# Altium PCB SA_1800_WIFI.PcbDoc (part 2 of 2)
Units mm, origin at the board's own origin, x right, y up, seen from the top; angles counter-clockwise.
Board outline 82.96 x 62.54 mm, 2 copper layers (Top Layer, Bottom Layer); 208 components, 153 nets, 664 pads, 246 vias.
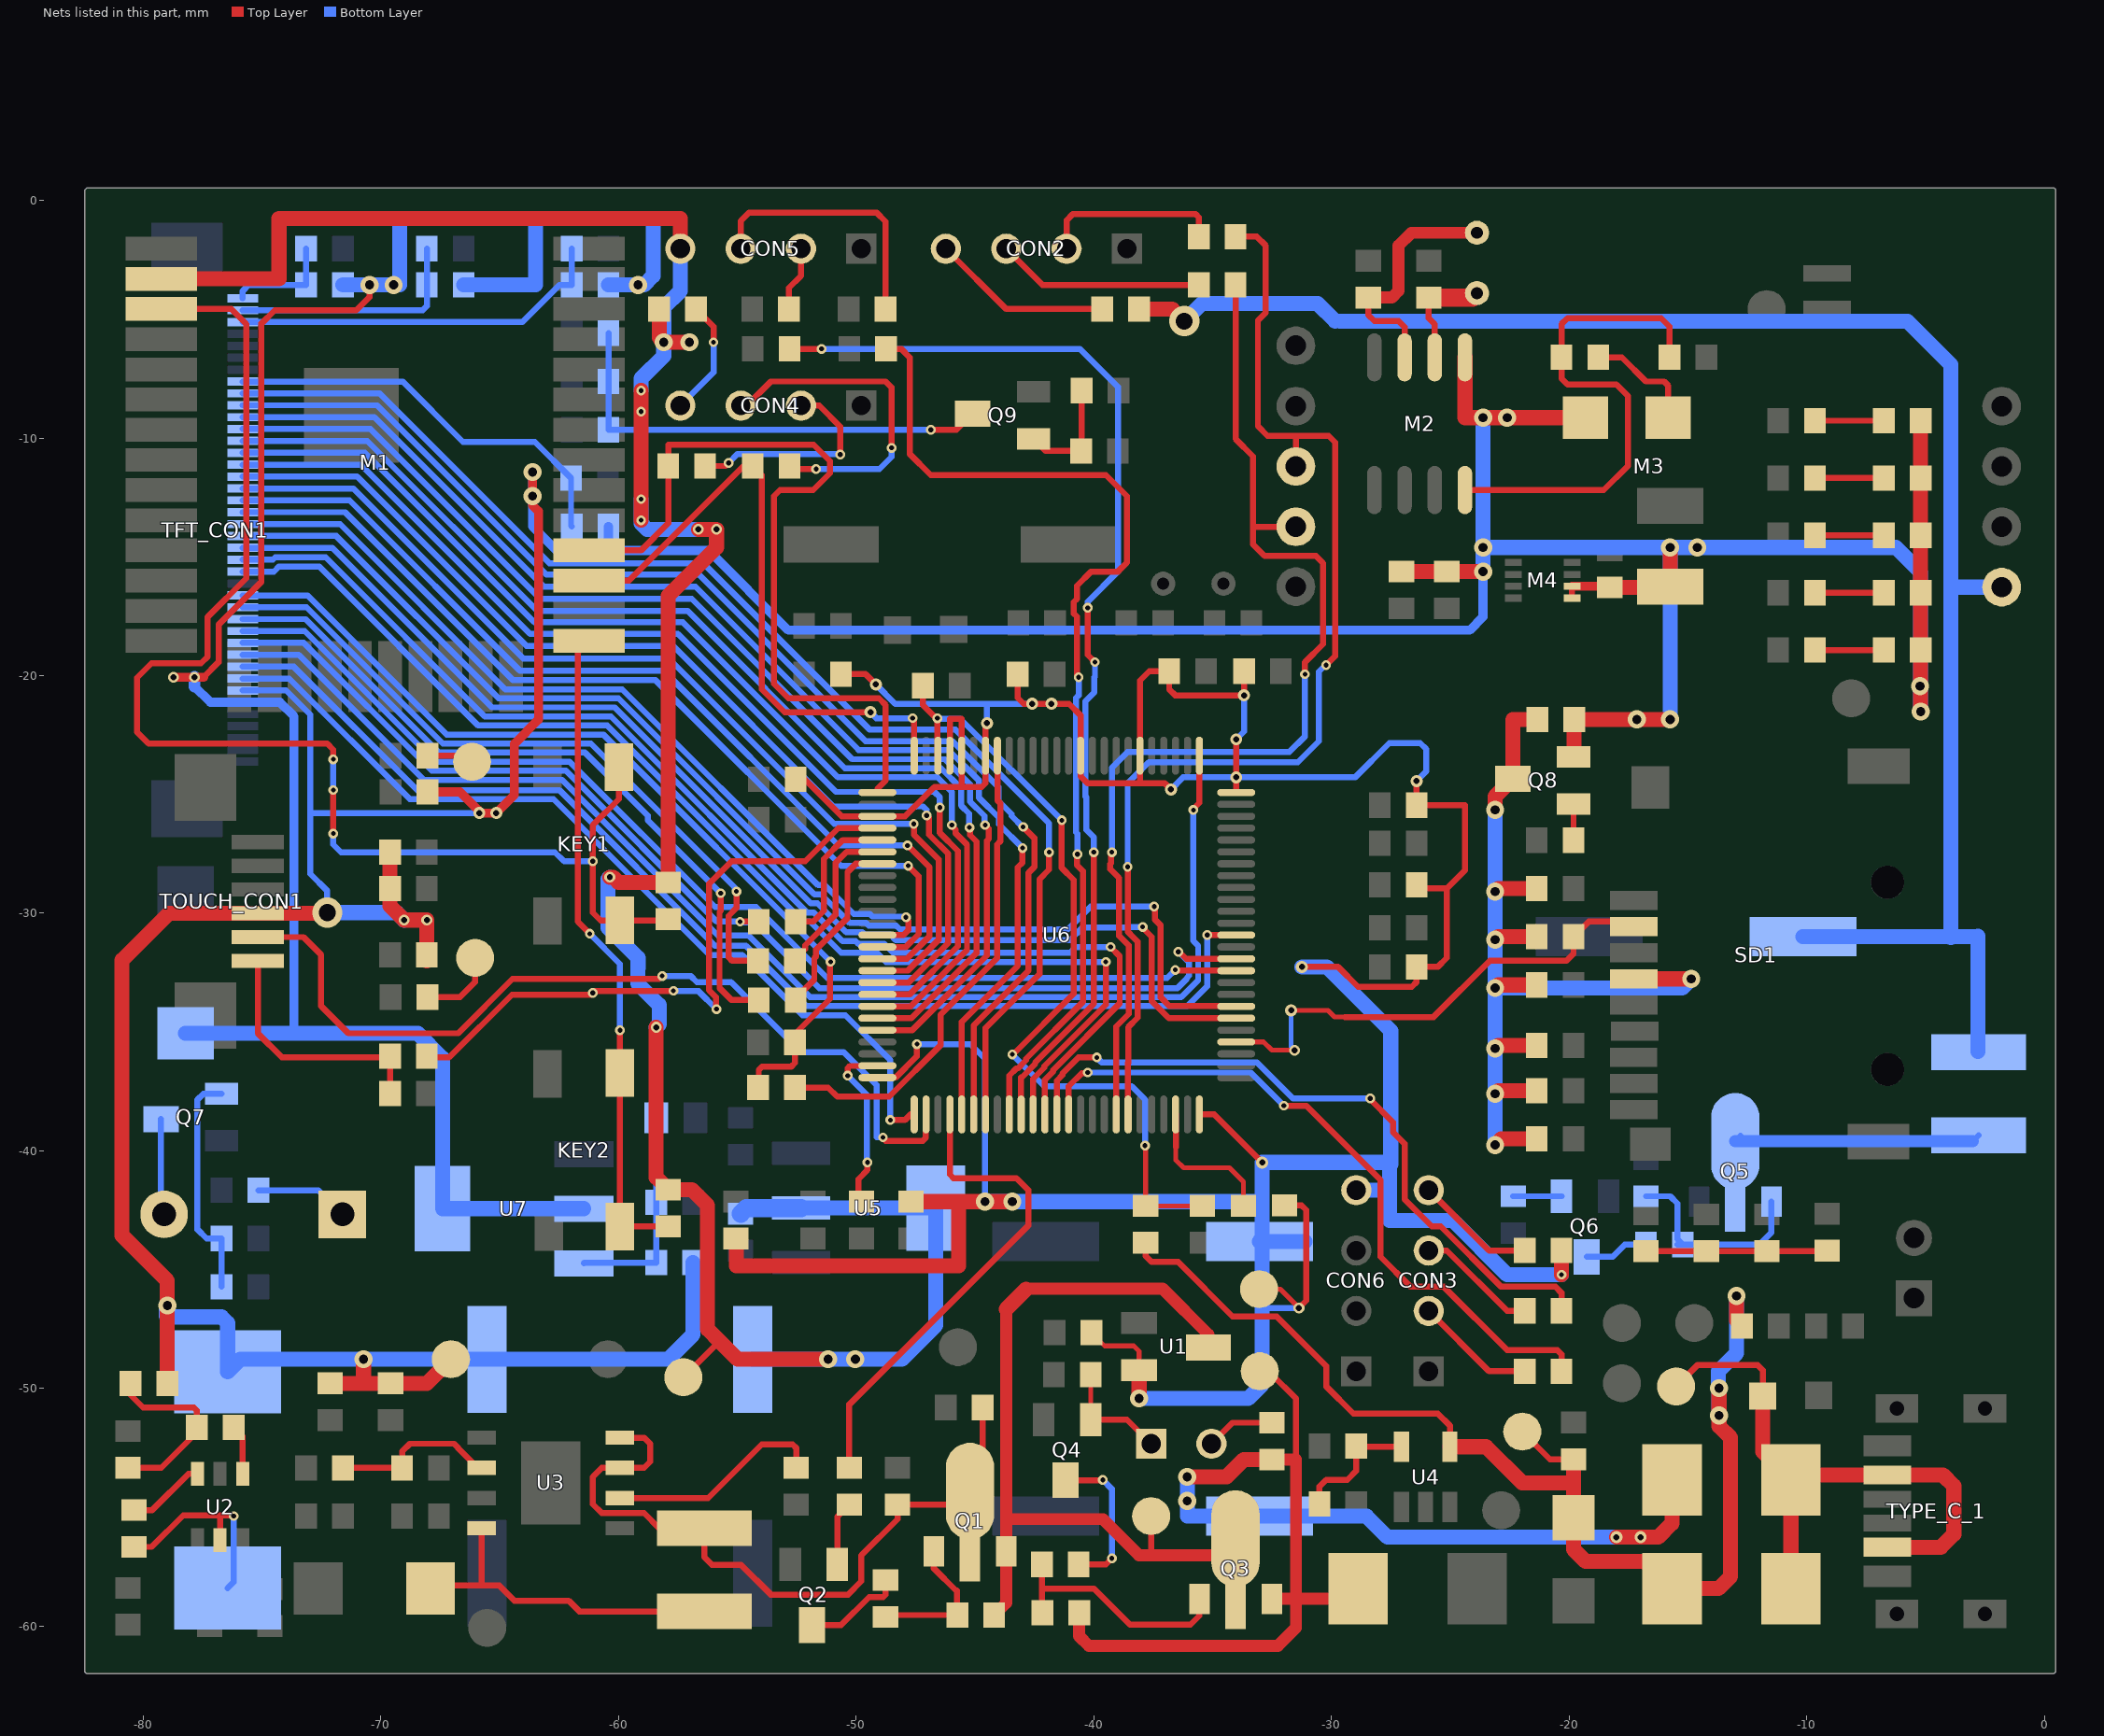
[diagram p2: the nets of this part, all layers, seen from the top]

## Via types
v1: diameter 0.762, hole 0.381, Top Layer to Bottom Layer, 94 vias
v2: diameter 0.406, hole 0.203, Top Layer to Bottom Layer, 93 vias
v3: diameter 0.508, hole 0.254, Top Layer to Bottom Layer, 32 vias
v4: diameter 0.457, hole 0.254, Top Layer to Bottom Layer, 23 vias
v5: diameter 1.27, hole 0.711, Top Layer to Bottom Layer, 2 vias
v6: diameter 0.635, hole 0.381, Top Layer to Bottom Layer, 1 vias
v7: diameter 0.406, hole 0.254, Top Layer to Bottom Layer, 1 vias

## Nets (pads, with @x,y where several pads share a name; then routed paths per layer and width w, separated by ;. In a path a pad name is that pad's centre, name@x,y a point inside that pad or via, vN(x,y) a via of type N, cw(c..) or ccw(c..) an arc to the next point about the centre after c; other vN are vias at no path point) (continued)
MCU_SDIO_D3: R108.1 SD1.2 U6.79 | length 21.1
  Top Layer w0.203: U6.79@-34.01,-35.418 -32.857,-35.418 -32.512,-35.763 v4(-31.547,-35.763) ; v3(-31.699,-34.087) -30.15,-34.087 -29.87,-34.366 -29.439,-34.366
  Top Layer w0.254: -29.439,-34.366 -25.705,-34.366 -23.343,-32.004 -20.117,-32.004 -19.812,-31.699 R108.1@-19.812,-30.988 -19.177,-30.353 -17.483,-30.353 SD1.2@-17.272,-30.564
  Bottom Layer w0.203: v3(-31.699,-34.087) -31.699,-35.687 -31.623,-35.763 v4(-31.547,-35.763)
MCU_TCH_INT_PB13: TOUCH_CON1.2 U6.52 | length 37.4
  Top Layer w0.254: TOUCH_CON1.2@-75.184,-31.004 -73.263,-31.004 -72.517,-31.75 -72.517,-33.909 -71.374,-35.052 -66.751,-35.052 -64.465,-32.766 -58.293,-32.766 v2(-58.166,-32.639) ; v2(-48.874,-39.432) -48.874,-39.467 -48.768,-39.573 -47.193,-39.573 -47.069,-39.449 -47.069,-38.477 U6.52@-47.06,-38.468
  Bottom Layer w0.254: v2(-58.166,-32.639) -56.97,-32.639 -56.71,-32.899 -55.266,-32.899 -52.326,-35.839 -50.532,-35.839 -49.149,-37.223 -49.149,-39.432 v2(-48.874,-39.432) ; v2(-48.874,-39.432) -48.874,-39.467 -48.839,-39.432 v2(-48.874,-39.432)
MCU_TCH_RST_IO_PC2: R109.1 U6.29 | length 27.1
  Top Layer w0.254: R109.1@-68.072,-36.068 -67.132,-36.068 -64.491,-33.426 -61.163,-33.426 v2(-61.087,-33.35) ; v2@-61.087,-33.274 -57.701,-33.274 v2(-57.693,-33.265) ; v2(-55.88,-34.036) -55.909,-34.007 -55.909,-33.53 -56.197,-33.241 -56.197,-28.753 -56.185,-28.753 -55.245,-27.813 -52.146,-27.813 -50.751,-26.418 U6.29@-49.11,-26.418
  Bottom Layer w0.254: v2(-57.693,-33.265) -57.678,-33.28 -56.636,-33.28 v2(-55.88,-34.036)
MCU_TFT_RST_IO_PC3: R71.2 U6.18 | length 20.5
  Top Layer w0.254: R71.2@-52.578,-37.338 -51.181,-37.338 -50.8,-37.719 -48.616,-37.719 -46.457,-35.56 -46.457,-34.276 -44.069,-31.888 -44.069,-27.102 -43.942,-26.975 -43.942,-25.365 -44.06,-25.247 U6.18@-44.06,-23.368
MCU_USART1_RX_CO2: M3.3 R28.1 U6.69 | length 49.9
  Top Layer w0.254: v2(-38.578,-28.047) -38.56,-28.065 -38.56,-30.788 -38.329,-31.019 -38.151,-31.197 -38.151,-34.391 -38.557,-34.798 -38.557,-36.296 -38.56,-36.298 U6.69@-38.56,-38.468 ; R28.1@-34.036,-1.524 -33.147,-1.524 -32.766,-1.905 -32.766,-4.724 -33.096,-5.055 -33.096,-9.5 -32.69,-9.906 -30.124,-9.906 -29.845,-10.185 -29.845,-19.177 v2(-30.226,-19.558) v2@-30.247,-19.579 ; M3.3@-31.496,-11.196 -31.496,-9.957
  Bottom Layer w0.254: v2(-38.578,-28.047) -38.578,-24.532 -37.694,-23.647 -31.42,-23.647 -30.531,-22.758 -30.531,-19.837 -30.293,-19.599 -30.226,-19.599 v2(-30.226,-19.558)
MCU_USART1_TX_CO2: M3.2 R29.1 U6.68 | length 47.7
  Top Layer w0.254: v2(-39.243,-27.432) -39.272,-27.461 -39.272,-27.897 -39.308,-27.933 -39.308,-28.143 -38.941,-28.51 -38.941,-30.946 -38.71,-31.177 -38.532,-31.355 -38.532,-34.233 -39.06,-34.761 U6.68@-39.06,-38.468 ; R29.1@-34.036,-3.556 -34.036,-10.033 -33.299,-10.77 -33.299,-14.478 -32.817,-14.961 -30.658,-14.961 -30.353,-15.265 -30.353,-18.669 -31.115,-19.431 v2(-31.115,-19.939) ; -33.253,-13.736 M3.2@-31.496,-13.736
  Bottom Layer w0.254: v2(-39.243,-27.432) -39.243,-23.876 -38.583,-23.216 -31.775,-23.216 -31.115,-22.555 v2(-31.115,-19.939)
MCU_USART2_RX_WIFI: M1.28 R34.1 U6.26 | length 34.1
  Top Layer w0.254: M1.28@-61.248,-14.732 -59.055,-14.732 -57.912,-13.589 R34.1@-57.912,-11.176 -57.912,-10.287 -51.791,-10.287 -51.105,-10.973 -51.105,-11.481 -51.816,-12.192 -53.213,-12.192 -53.467,-12.446 -53.467,-20.345 -52.857,-20.955 -49.047,-20.955 -48.761,-21.241 -48.761,-24.413 -49.11,-24.762
MCU_USART2_TX_WIFI: M1.27 R35.1 U6.25 | length 26.9
  Top Layer w0.254: M1.27@-61.248,-16.002 -59.563,-16.002 -54.737,-11.176 R35.1@-54.356,-11.176 -53.975,-11.557 -53.975,-20.574 -53.01,-21.539 v3(-49.403,-21.539) ; v2(-47.625,-21.789) -47.625,-21.83 -47.56,-21.895 -47.56,-23.347 U6.25@-47.569,-23.356
  Bottom Layer w0.254: v3(-49.403,-21.539) -49.153,-21.789 v2(-47.625,-21.789)
MCU_USART6_RX: R31.1 U6.64 | length 29.7
  Top Layer w0.254: U6.64@-41.06,-38.468 -41.06,-37.287 -40.505,-36.732 -40.288,-36.732 v2(-40.259,-36.703) ; v2(-32.004,-38.1) -31.064,-38.1 -27.94,-41.224 -27.94,-44.45 -26.67,-45.72 -25.273,-45.72 -22.606,-48.387 -20.498,-48.387 -20.32,-48.565 R31.1@-20.32,-49.276
  Bottom Layer w0.254: v2(-40.259,-36.703) -33.401,-36.703 v2(-32.004,-38.1)
MCU_USART6_TX: R32.1 U6.63 | length 29.7
  Top Layer w0.254: U6.63@-41.56,-38.468 -41.56,-37.048 -41.326,-36.814 -41.326,-36.75 -40.644,-36.068 v2(-39.878,-36.068) ; v2(-28.372,-37.795) -28.413,-37.795 -27.407,-38.802 -27.407,-39.218 -26.924,-39.7 -26.924,-42.037 -25.781,-43.18 -25.4,-43.18 -22.86,-45.72 -20.574,-45.72 -20.32,-45.974 R32.1@-20.32,-46.736
  Bottom Layer w0.254: v2(-39.878,-36.068) -39.675,-36.271 -33.147,-36.271 -31.623,-37.795 v2(-28.372,-37.795)
MCU_VCC_ALL_CTR_PB15: R2.1 U6.54 | length 20.9
  Top Layer w0.254: R2.1@-50.292,-53.34 -50.292,-50.673 -42.763,-43.144 -42.763,-41.641 -43.256,-41.148 -45.911,-41.148 -46.06,-40.999 U6.54@-46.06,-38.468
MCU_WAKE_UP_PA0: C17.2 R19.1 R20.2 U6.23 | length 34.7
  Top Layer w0.203: v2(-37.846,-39.776) -37.821,-39.802 R19.1@-37.821,-42.316 R20.2@-35.433,-42.316
  Top Layer w0.254: C17.2@-47.193,-20.422 -47.193,-21.234 v2@-46.584,-21.844 ; v2(-46.584,-21.793) v2@-46.584,-21.844 ; U6.23@-46.56,-23.368 -46.584,-23.344 v2@-46.584,-21.844 ; v2@-46.56,-21.868 v2@-46.584,-21.844 ; v2@-43.399,-35.941 -40.843,-33.385 -40.843,-28.6 -41.351,-28.092 v2(-41.351,-26.086) v2@-41.275,-26.086
  Bottom Layer w0.254: v2@-46.56,-21.819 -45.618,-21.819 v2(-41.351,-26.086) ; v2(-43.434,-35.941) -42.088,-37.287 -38.405,-37.287 -37.846,-37.846 v2(-37.846,-39.776)
NetC3_2: C3.2 C4.2 L2.1 Q1.2 U3.3 U3.4 | length 30.7
  Top Layer w0.254: U3.4@-59.944,-52.07 -58.928,-52.07 -58.674,-52.324 -58.674,-53.086 -58.928,-53.34 U3.3@-59.944,-53.34 -60.706,-53.34 -61.087,-53.721 -61.087,-54.864 -60.706,-55.245 -58.928,-55.245 -58.293,-55.88 L2.1@-56.388,-55.88 -56.388,-57.099 -56.068,-57.419 -54.849,-57.419 -53.594,-58.674 -50.345,-58.674 -49.784,-58.113 -49.784,-57.023 -48.26,-55.499 C3.2@-48.26,-54.889 -45.787,-54.889 Q1.2@-45.212,-54.314 -44.679,-53.781 C4.2@-44.679,-50.8
NetC6_1: C6.1 L1.1 U2.2 | length 8.9
  Top Layer w0.254: C6.1@-80.391,-56.667 -79.654,-56.667 -78.324,-55.337 -76.774,-55.337 ; U2.2@-76.774,-56.388 -76.774,-55.337 ; v2(-76.2,-55.372) -76.235,-55.337 -76.774,-55.337
  Bottom Layer w0.254: L1.1@-76.454,-58.398 -76.2,-58.144 v2(-76.2,-55.372)
NetC6_2: C6.2 U2.6 | length 3.3
  Top Layer w0.254: C6.2@-80.391,-55.118 -79.629,-55.118 -78.099,-53.588 U2.6@-77.724,-53.588
NetC18_2: C18.2 R22.1 R23.2 R24.2 | length 7.6
  Top Layer w0.254: R24.2@-16.764,-44.221 R23.2@-14.224,-44.221 C18.2@-11.684,-44.221 R22.1@-9.169,-44.221
NetC28_2: C28.2 U6.49 | length 7.5
  Top Layer w0.254: v2(-50.362,-36.836) -50.354,-36.836 -50.354,-36.511 -50.27,-36.427 -49.119,-36.427 U6.49@-49.11,-36.418 ; C28.2@-50.06,-42.139 -49.911,-41.99 -49.911,-41.189 -49.53,-40.808 v2(-49.53,-40.488)
  Bottom Layer w0.254: v2(-50.362,-36.836) -49.555,-37.642 -49.555,-40.462 v2(-49.53,-40.488)
NetC30_2: C30.2 M2.2 X1.1 | length 4.7
  Top Layer w0.254: C30.2@-25.908,-4.089 -25.908,-4.953 -25.654,-5.207 M2.2@-25.654,-6.604
  Top Layer w0.762: C30.2@-25.908,-4.089 -24.065,-4.089 X1.1@-23.876,-3.9
NetC31_2: C31.2 M2.3 X1.2 | length 10.6
  Top Layer w0.254: C31.2@-28.448,-4.089 -28.448,-4.826 -28.194,-5.08 -27.178,-5.08 -26.924,-5.334 M2.3@-26.924,-6.604
  Top Layer w0.508: C31.2@-28.448,-4.089 -27.457,-4.089 -27.178,-3.81 -27.178,-1.905 -26.633,-1.36 X1.2@-23.876,-1.36
NetC33_1: C33.1 U6.73 | length 6.2
  Top Layer w0.203: -36.551,-39.835 -36.551,-40.386 -36.22,-40.716 -34.29,-40.716 -33.706,-41.3 C33.1@-33.706,-42.316
  Top Layer w0.254: U6.73@-36.56,-38.468 -36.551,-38.477 -36.551,-39.835
NetC40_1: C40.1 R57.1 R58.1 U7.3 | length 9.2
  Bottom Layer w0.254: U7.3@-61.468,-44.732 -61.44,-44.704 R58.1@-58.42,-44.704 R57.1@-58.42,-42.164 C40.1@-58.42,-38.608
NetCON1_1: CON1.1 Q4.1 R10.1 | length 4.8
  Top Layer w0.203: Q4.1@-40.132,-51.308 R10.1@-40.132,-49.422
  Top Layer w0.254: Q4.1@-40.132,-51.308 -38.608,-51.308 CON1.1@-37.592,-52.324
NetCON1_2: CON1.2 R8.2 | length 2.9
  Top Layer w0.254: CON1.2@-35.052,-52.324 -34.169,-51.441 R8.2@-32.512,-51.441
NetCON2_2: CON2.2 R28.2 | length 7.7
  Top Layer w0.254: CON2.2@-41.148,-2.032 -41.148,-0.838 -40.894,-0.584 -35.712,-0.584 -35.585,-0.711 R28.2@-35.585,-1.524
NetCON2_3: CON2.3 R29.2 | length 8.7
  Top Layer w0.254: CON2.3@-43.688,-2.032 -42.164,-3.556 R29.2@-35.585,-3.556
NetCON2_4: CON2.4 R30.2 | length 7.6
  Top Layer w0.254: CON2.4@-46.228,-2.032 -43.688,-4.572 R30.2@-39.649,-4.572
NetCON3_2: CON3.2 R31.2 | length 5.1
  Top Layer w0.254: CON3.2@-25.908,-46.736 -23.368,-49.276 R31.2@-21.869,-49.276
NetCON3_3: CON3.3 R32.2 | length 5.1
  Top Layer w0.254: CON3.3@-25.908,-44.196 -25.146,-44.196 -22.606,-46.736 R32.2@-21.869,-46.736
NetCON3_4: CON3.4 R33.2 | length 5.1
  Top Layer w0.254: CON3.4@-25.908,-41.656 -23.368,-44.196 R33.2@-21.869,-44.196
NetCON4_2: CON4.2 R34.2 | length 9.1
  Top Layer w0.254: R34.2@-56.363,-11.176 -55.499,-11.176 v2(-55.372,-11.049) ; CON4.2@-52.324,-8.636 -51.562,-8.636 -50.673,-9.525 v2(-50.673,-10.693)
  Bottom Layer w0.254: v2(-55.372,-11.049) -54.991,-10.668 v2@-50.673,-10.668
NetCON4_3: CON4.3 R35.2 | length 14.4
  Top Layer w0.254: CON4.3@-54.864,-8.636 -54.61,-8.636 -53.594,-7.62 -48.768,-7.62 -48.514,-7.874 v2(-48.514,-10.414) ; R35.2@-52.807,-11.176 -52.68,-11.303 v2(-51.689,-11.303)
  Bottom Layer w0.254: v2(-51.689,-11.303) -49.022,-11.303 -48.514,-10.795 v2(-48.514,-10.414)
NetCON4_4: CON4.4 R36.2 | length 4.9
  Top Layer w0.254: R36.2@-56.744,-4.572 -56.007,-5.309 v2(-56.007,-5.969)
  Bottom Layer w0.254: CON4.4@-57.404,-8.636 -56.007,-7.239 v2(-56.007,-5.969)
NetCON5_2: CON5.2 R37.1 | length 2.8
  Top Layer w0.254: R37.1@-52.832,-4.572 -52.832,-3.683 -52.324,-3.175 CON5.2@-52.324,-2.032
NetCON5_3: CON5.3 R38.1 | length 11.3
  Top Layer w0.254: CON5.3@-54.864,-2.032 -54.864,-0.864 -54.508,-0.508 -49.149,-0.508 -48.768,-0.889 R38.1@-48.768,-4.572
NetD4_2: D4.2 L2.2 U3.8 | length 14.5
  Top Layer w0.254: D4.2@-67.922,-58.42 -67.795,-58.293 -65.786,-58.293 ; U3.8@-65.761,-55.88 -65.761,-58.268 -65.786,-58.293 ; L2.2@-56.388,-59.38 -61.651,-59.38 -62.103,-58.928 -64.389,-58.928 -65.024,-58.293 -65.786,-58.293
NetD6_2: D6.2 R48.2 | length 4.8
  Top Layer w0.254: R48.2@-18.771,-6.604 -17.78,-6.604 -16.764,-7.62 -16.002,-7.62 -15.824,-7.798 D6.2@-15.824,-9.144
NetKEY1_2: KEY1.2 M1.3 R21.1 | length 57.8
  Top Layer w0.254: M1.3@-79.248,-4.572 -76.302,-4.572 -75.667,-5.207 -75.667,-15.9 -77.292,-17.526 -77.292,-19.202 -77.572,-19.482 -79.654,-19.482 -80.264,-20.091 -80.264,-22.377 -79.781,-22.86 -72.263,-22.86 -72.009,-23.114 v2(-72.009,-23.52) ; v2(-72.009,-26.645) v2(-72.009,-24.816) ; KEY1.2@-59.992,-23.852 -59.992,-25.194 -61.087,-26.289 v2(-61.087,-27.813) -61.087,-29.972 -60.757,-30.302 KEY1.2@-59.943,-30.302 -57.962,-30.302 R21.1@-57.912,-30.251
  Bottom Layer w0.254: v2(-72.009,-26.645) -72.009,-27.102 -71.679,-27.432 -62.676,-27.432 -62.295,-27.813 v2(-61.087,-27.813) ; v2(-72.009,-24.816) v2(-72.009,-23.52)
NetKEY2_1: KEY2.1 M1.25 R25.1 | length 27.6
  Top Layer w0.254: M1.25@-61.248,-18.542 -61.722,-19.016 -61.722,-30.353 v2(-61.214,-30.861) ; v2(-59.944,-34.925) -59.944,-35.293 -59.957,-35.306 -59.957,-36.716 KEY2.1@-59.944,-36.728 KEY2.1@-59.944,-43.18 R25.1@-57.912,-43.18
  Bottom Layer w0.254: v2(-61.214,-30.861) -59.944,-32.131 v2(-59.944,-34.925)
NetL3_1: L3.1 Q5.2 | length 10.7
  Bottom Layer w0.254: Q5.2@-13.007,-39.592 Q5.2@-12.785,-39.37 ; L3.1@-3.016,-39.592 L3.1@-2.769,-39.345
  Bottom Layer w0.508: Q5.2@-13.007,-39.592 L3.1@-3.016,-39.592
NetLED_SMD1_1: LED_SMD1.1 R50.2 | length 2.9
  Top Layer w0.254: LED_SMD1.1@-9.652,-18.923 R50.2@-6.756,-18.923
NetLED_SMD2_1: LED_SMD2.1 R51.2 | length 2.9
  Top Layer w0.254: LED_SMD2.1@-9.652,-16.51 R51.2@-6.756,-16.51
NetLED_SMD3_1: LED_SMD3.1 R52.2 | length 2.9
  Top Layer w0.254: LED_SMD3.1@-9.652,-14.097 R52.2@-6.756,-14.097
NetLED_SMD4_1: LED_SMD4.1 R53.2 | length 2.9
  Top Layer w0.254: LED_SMD4.1@-9.652,-11.684 R53.2@-6.756,-11.684
NetLED_SMD5_1: LED_SMD5.1 R54.2 | length 2.9
  Top Layer w0.254: LED_SMD5.1@-9.652,-9.271 R54.2@-6.756,-9.271
NetM2_8: M2.8 R48.1 R55.2 | length 21.7
  Top Layer w0.254: M2.8@-24.384,-12.192 -18.542,-12.192 -17.526,-11.176 -17.526,-8.23 -18.009,-7.747 -20.066,-7.747 -20.32,-7.493 R48.1@-20.32,-6.604 -20.32,-5.207 -20.066,-4.953 -16.129,-4.953 -15.773,-5.309 R55.2@-15.773,-6.604
NetQ1_1: Q1.1 R1.2 R4.1 | length 6.2
  Top Layer w0.254: R4.1@-48.768,-59.614 -48.69,-59.536 R1.2@-45.745,-59.536 -45.762,-59.519 -45.762,-58.505 -45.802,-58.505 -46.736,-57.571 Q1.1@-46.736,-56.854
NetQ2_1: Q2.1 R2.2 | length 2.7
  Top Layer w0.254: Q2.1@-50.8,-57.404 -50.8,-55.397 R2.2@-50.292,-54.889
NetQ2_3: Q2.3 R4.2 | length 4.2
  Top Layer w0.254: Q2.3@-51.867,-59.957 -50.64,-59.957 -49.459,-58.776 -48.87,-58.776 -48.768,-58.674 R4.2@-48.768,-58.064
NetQ3_1: Q3.1 R9.1 R12.2 | length 10.2
  Top Layer w0.254: R12.2@-42.189,-57.404 -42.189,-58.42 ; R9.1@-42.164,-59.436 -42.189,-59.411 -42.189,-58.42 ; Q3.1@-35.56,-58.854 -35.56,-59.563 -35.941,-59.944 -38.481,-59.944 -40.005,-58.42 -42.189,-58.42
NetQ4_3: Q4.3 R12.1 | length 6.5
  Top Layer w0.254: Q4.3@-41.199,-53.861 -39.637,-53.861 v2(-39.624,-53.848) ; R12.1@-40.64,-57.404 -39.497,-57.404 v2(-39.243,-57.15)
  Bottom Layer w0.254: v2(-39.624,-53.848) -39.243,-54.229 v2(-39.243,-57.15)
NetQ5_1: Q5.1 R73.1 R77.2 | length 8.7
  Bottom Layer w0.254: R73.1@-16.764,-41.91 -15.748,-41.91 -15.443,-42.215 -15.443,-43.713 R77.2@-15.215,-43.942 ; R77.2@-15.443,-43.942 R77.2@-15.215,-43.942 ; Q5.1@-11.483,-42.132 -11.483,-43.434 -11.991,-43.942 R77.2@-15.215,-43.942
NetQ6_1: Q6.1 R69.1 | length 2
  Bottom Layer w0.254: R69.1@-22.352,-41.91 Q6.1@-20.32,-41.91
NetQ6_3: Q6.3 R77.1 | length 2.7
  Bottom Layer w0.254: Q6.3@-19.253,-44.463 -18.174,-44.463 -17.653,-43.942 R77.1@-16.764,-43.942
NetQ7_1: Q7.1 R75.1 R81.2 | length 9.8
  Bottom Layer w0.254: R75.1@-76.708,-45.72 R81.2@-76.708,-43.688 -77.343,-43.688 -77.724,-43.307 -77.724,-37.846 -77.47,-37.592 Q7.1@-76.708,-37.592
NetQ7_3: Q7.3 SPK1.2 | length 4.1
  Bottom Layer w0.254: Q7.3@-79.261,-38.659 -79.261,-42.539 SPK1.2@-79.128,-42.672
NetQ8_1: Q8.1 R76.1 | length 1.5
  Top Layer w0.254: R76.1@-19.812,-26.924 Q8.1@-19.812,-25.4
NetQ9_1: Q9.1 R115.1 R116.2 | length 4.8
  Top Layer w0.254: Q9.1@-42.545,-10.033 -42.037,-10.541 R116.2@-40.538,-10.541 -40.513,-10.516 R115.1@-40.513,-8.001
NetQ9_3: Q9.3 R112.2 R113.2 R114.2 | length 19.7
  Top Layer w0.254: v2(-46.863,-9.652) -45.783,-9.652 Q9.3@-45.098,-8.966
  Bottom Layer w0.254: R114.2@-60.427,-5.588 R113.2@-60.427,-7.62 R112.2@-60.427,-9.652 v2(-46.863,-9.652)
NetR3_1: R3.1 R7.2 U4.5 | length 5.5
  Top Layer w0.254: R7.2@-30.505,-54.864 -30.505,-54.127 -30.226,-53.848 -29.337,-53.848 -28.956,-53.467 R3.1@-28.956,-52.424 -28.929,-52.451 U4.5@-27.051,-52.451
NetR6_1: R6.1 U3.2 | length 9.3
  Top Layer w0.254: U3.2@-59.944,-54.61 -56.236,-54.61 -53.975,-52.349 -52.68,-52.349 -52.527,-52.502 R6.1@-52.527,-53.34
NetR11_1: R11.1 U2.4 | length 2.1
  Top Layer w0.254: R11.1@-76.2,-51.638 -75.819,-52.019 -75.819,-53.583 U2.4@-75.824,-53.588
NetR11_2: R11.2 R13.2 R14.1 | length 8
  Top Layer w0.254: R14.1@-80.645,-53.34 -79.248,-53.34 -77.749,-51.841 R11.2@-77.749,-51.638 -77.749,-50.927 -77.876,-50.8 -80.01,-50.8 -80.539,-50.271 R13.2@-80.539,-49.784
NetR15_2: R15.2 R16.2 U3.6 | length 7.1
  Top Layer w0.254: R15.2@-71.603,-53.34 R16.2@-69.113,-53.34 -69.113,-52.654 -68.783,-52.324 -66.929,-52.324 -66.742,-52.511 -66.742,-52.528 -65.929,-53.34 U3.6@-65.761,-53.34
NetR26_2: R26.2 TEST16.1 | length 2
  Top Layer w0.254: R26.2@-68.047,-23.368 -66.421,-23.368 TEST16.1@-66.167,-23.622
NetR27_2: R27.2 TEST17.1 | length 3.3
  Top Layer w0.254: R27.2@-68.047,-33.528 -66.675,-33.528 -66.04,-32.893 TEST17.1@-66.04,-31.877
NetR39_2: R39.2 U6.30 | length 6.1
  Top Layer w0.254: R39.2@-52.553,-30.353 -51.816,-30.353 -51.359,-29.896 -51.359,-27.711 -50.565,-26.918 U6.30@-49.11,-26.918
NetR40_2: R40.2 U6.31 | length 6.8
  Top Layer w0.254: R40.2@-52.578,-32.004 -52.578,-31.928 -52.146,-31.496 -52.146,-31.344 -50.876,-30.074 -50.876,-27.889 -50.405,-27.418 U6.31@-49.11,-27.418
NetR41_2: R41.2 U6.32 | length 7.7
  Top Layer w0.254: R41.2@-52.553,-33.655 -52.553,-33.579 -51.765,-32.791 -51.765,-31.888 -51.689,-31.813 -51.689,-31.521 -50.368,-30.201 -50.368,-28.27 -50.016,-27.918 U6.32@-49.11,-27.918
NetR42_2: R42.2 U6.60 | length 47.4
  Top Layer w0.254: R42.2@-52.807,-6.248 v2(-51.46,-6.248) ; U6.60@-43.06,-38.468 -43.06,-36.906 -43.034,-36.906 -42.469,-36.341 -42.469,-36.277 -40.005,-33.813 v2(-40.005,-27.432) ; v2@-40.259,-17.069 v2(-40.259,-17.145) -40.259,-19.126 v2(-39.954,-19.431)
  Bottom Layer w0.254: v2(-51.46,-6.248) -40.589,-6.248 -38.989,-7.849 -38.989,-15.621 -40.259,-16.891 v2(-40.259,-17.145) ; v2(-40.005,-27.432) -40.005,-26.798 -40.31,-26.493 -40.31,-25.127 -40.366,-25.071 -40.366,-21.093 -39.98,-20.706 -39.98,-20.066 -39.954,-20.041 v2(-39.954,-19.431)
NetR43_2: R43.2 U6.59 | length 44.3
  Top Layer w0.254: R43.2@-48.743,-6.248 -48.108,-6.248 -47.752,-6.604 -47.752,-10.668 -46.863,-11.557 -39.497,-11.557 -38.608,-12.446 -38.608,-15.24 -38.989,-15.621 -40.115,-15.621 -40.716,-16.222 -40.716,-16.776 -40.843,-16.903 -40.843,-17.387 -40.716,-17.514 -40.716,-19.99 v2(-40.64,-20.066) ; U6.59@-43.56,-38.468 -43.56,-36.829 -43.256,-36.525 -43.192,-36.525 -42.85,-36.183 -42.85,-36.119 -40.462,-33.731 -40.462,-28.227 -40.718,-27.972 -40.718,-27.543 v2(-40.691,-27.516)
  Bottom Layer w0.254: v2(-40.691,-27.516) -40.691,-26.651 -40.747,-26.595 -40.747,-20.935 -40.64,-20.828 v2(-40.64,-20.066)
NetR59_1: R59.1 R61.1 TFT_CON1.38 | length 16
  Bottom Layer w0.254: TFT_CON1.38@-75.819,-5.122 -64.05,-5.122 -62.484,-3.556 R59.1@-61.976,-3.556 R61.1@-61.976,-2.032
NetR62_1: R62.1 R64.1 TFT_CON1.39 | length 10.2
  Bottom Layer w0.254: TFT_CON1.39@-75.819,-4.622 -68.249,-4.622 -68.072,-4.445 R62.1@-68.072,-3.556 R64.1@-68.072,-2.032
NetR65_1: R65.1 R67.1 TFT_CON1.40 | length 4.6
  Bottom Layer w0.254: TFT_CON1.40@-75.819,-4.122 -75.819,-3.81 -75.565,-3.556 R65.1@-73.152,-3.556 R67.1@-73.152,-2.032
NetR70_1: R70.1 R71.1 TFT_CON1.15 | length 38.4
  Top Layer w0.254: R71.1@-54.127,-37.338 -54.102,-37.313 -54.102,-36.598 -53.953,-36.449 -52.727,-36.449 -52.578,-36.3 R70.1@-52.578,-35.433 -52.578,-35.077 -51.11,-33.61 -51.11,-32.069 v2(-51.081,-32.04)
  Bottom Layer w0.254: TFT_CON1.15@-75.819,-16.622 -73.099,-16.622 -67.242,-22.479 -60.642,-22.479 v2(-51.081,-32.04)
NetR83_1: R83.1 SPK1.1 | length 4
  Bottom Layer w0.254: R83.1@-75.159,-41.656 -72.644,-41.656 SPK1.1@-71.628,-42.672
NetR107_1: R107.1 R117.2 TFT_CON1.33 | length 17.5
  Bottom Layer w0.254: TFT_CON1.33@-75.819,-7.622 -69.086,-7.622 -66.548,-10.16 -63.525,-10.16 R117.2@-62.001,-11.684 -62.001,-13.691 R107.1@-61.976,-13.716
NetR109_2: R109.2 R110.2 TOUCH_CON1.1 | length 10.6
  Top Layer w0.254: TOUCH_CON1.1@-75.184,-32.004 -75.184,-35.052 -74.168,-36.068 -69.621,-36.068 R110.2@-69.621,-37.592
POW_ALL: C14.1 D1.2 D5.2 Q3.3 R8.1 R9.2 TEST6.1 | length 56.5
  Top Layer w0.254: TEST6.1@-33.02,-49.276 -32.639,-49.276 TEST6.1@-32.512,-49.403 ; TEST6.1@-32.512,-49.276 TEST6.1@-32.512,-49.403 ; -31.496,-52.99 -31.496,-50.419 TEST6.1@-32.512,-49.403 ; D5.2@-29.31,-58.854 D5.2@-28.876,-58.42
  Top Layer w0.508: R9.2@-40.615,-59.436 -40.615,-60.427 -40.208,-60.833 -32.258,-60.833 -31.496,-60.071 -31.496,-58.854 ; Q3.3@-32.512,-58.854 -31.496,-58.854 ; R8.1@-32.512,-52.99 -31.496,-52.99 -31.496,-58.854 ; D5.2@-29.31,-58.854 -31.496,-58.854
  Top Layer w0.635: v1(-36.068,-53.721) -34.417,-53.721 -33.686,-52.99 R8.1@-32.512,-52.99 ; v3(-18.009,-56.261) v3(-16.993,-56.261) -16.256,-56.261 -15.668,-55.673 D1.2@-15.668,-53.848
  Bottom Layer w0.635: v1(-36.068,-53.721) v1(-36.068,-54.737) -36.068,-55.372 C14.1@-33.02,-55.372 -28.524,-55.372 -27.635,-56.261 v3(-18.009,-56.261) v3@-17.018,-56.261
TFT_P_DB0_FSMC_D0: TFT_CON1.17 U6.61 | length 51
  Top Layer w0.254: U6.61@-42.56,-38.468 -42.56,-36.971 -42.088,-36.499 -42.088,-36.434 -39.497,-33.844 v2(-39.497,-32.048)
  Bottom Layer w0.254: TFT_CON1.17@-75.819,-15.622 -74.513,-15.622 -74.294,-15.403 -72.608,-15.403 -65.913,-22.098 -60.484,-22.098 -52.236,-30.346 -51.949,-30.346 -50.632,-31.663 -49.135,-31.663 -48.75,-32.048 v2(-39.497,-32.048)
TFT_P_DB1_FSMC_D1: TFT_CON1.18 U6.62 | length 52.1
  Top Layer w0.254: U6.62@-42.06,-38.468 -42.06,-37.01 -41.707,-36.656 -41.707,-36.592 -38.913,-33.798 -38.913,-31.806 -39.294,-31.425 v2(-39.294,-31.419)
  Bottom Layer w0.254: TFT_CON1.18@-75.819,-15.122 -74.551,-15.122 -74.451,-15.022 -72.329,-15.022 -65.634,-21.717 -60.326,-21.717 -52.079,-29.965 -51.791,-29.965 -50.582,-31.174 -50.023,-31.174 -49.915,-31.282 -48.83,-31.282 -48.445,-31.667 -41.003,-31.667 -40.756,-31.419 v2(-39.294,-31.419)
TFT_P_DB2_FSMC_D2: TFT_CON1.19 U6.81 | length 52.1
  Top Layer w0.254: v2(-37.945,-30.577) -37.945,-30.618 -37.567,-30.996 -37.567,-33.698 -36.846,-34.418 U6.81@-34.01,-34.418
  Bottom Layer w0.254: TFT_CON1.19@-75.819,-14.622 -72.043,-14.622 -65.329,-21.336 -60.168,-21.336 -51.921,-29.584 -51.633,-29.584 -50.424,-30.793 -49.741,-30.793 -49.633,-30.901 -48.576,-30.901 -48.343,-31.133 -41.008,-31.133 -40.482,-30.607 -38.657,-30.607 -38.626,-30.577 v2(-37.945,-30.577)
TFT_P_DB3_FSMC_D3: TFT_CON1.20 U6.82 | length 52.9
  Top Layer w0.254: v2(-37.465,-29.718) -37.436,-29.747 -37.436,-30.26 -37.186,-30.51 -37.186,-33.54 -36.817,-33.909 -34.019,-33.909 U6.82@-34.01,-33.918
  Bottom Layer w0.254: TFT_CON1.20@-75.819,-14.122 -71.882,-14.122 -65.049,-20.955 -60.011,-20.955 -51.763,-29.203 -51.476,-29.203 -50.266,-30.412 -49.584,-30.412 -49.476,-30.52 -48.322,-30.52 -48.158,-30.683 -41.097,-30.683 -40.132,-29.718 v2(-37.465,-29.718)
TFT_P_DB4_FSMC_D4: TFT_CON1.21 U6.38 | length 36.7
  Top Layer w0.254: U6.38@-49.11,-30.918 -48.012,-30.918 -47.799,-30.705 -47.799,-30.317 -47.907,-30.209 v2(-47.907,-30.168)
  Bottom Layer w0.254: TFT_CON1.21@-75.819,-13.622 -71.722,-13.622 -64.77,-20.574 -59.853,-20.574 -51.605,-28.822 -51.318,-28.822 -50.109,-30.031 -49.426,-30.031 -49.318,-30.139 -47.936,-30.139 v2(-47.907,-30.168)
TFT_P_DB5_FSMC_D5: TFT_CON1.22 U6.39 | length 39.2
  Top Layer w0.254: U6.39@-49.11,-31.418 -47.909,-31.418 -47.371,-30.88 -47.371,-28.448 v2(-47.816,-28.004)
  Bottom Layer w0.254: TFT_CON1.22@-75.819,-13.122 -71.511,-13.122 -64.44,-20.193 -58.445,-20.193 -50.635,-28.004 v2(-47.816,-28.004)
TFT_P_DB6_FSMC_D6: TFT_CON1.23 U6.40 | length 40.8
  Top Layer w0.254: U6.40@-49.11,-31.918 -47.87,-31.918 -46.914,-30.961 -46.914,-28.065 -47.833,-27.146 v2(-47.847,-27.146)
  Bottom Layer w0.254: TFT_CON1.23@-75.819,-12.622 -71.325,-12.622 -64.16,-19.787 -58.115,-19.787 -50.756,-27.146 v2(-47.847,-27.146)
TFT_P_DB7_FSMC_D7: TFT_CON1.24 U6.41 | length 42.5
  Top Layer w0.254: U6.41@-49.11,-32.418 -47.832,-32.418 -46.533,-31.119 -46.533,-27.737 -47.575,-26.694 v2(-47.575,-26.239)
  Bottom Layer w0.254: TFT_CON1.24@-75.819,-12.122 -71.165,-12.122 -64.008,-19.279 -57.887,-19.279 -50.926,-26.239 v2(-47.575,-26.239)
TFT_P_DB8_FSMC_D8: TFT_CON1.25 U6.42 | length 44
  Top Layer w0.254: U6.42@-49.11,-32.918 -47.793,-32.918 -46.126,-31.252 -46.126,-27.502 -46.939,-26.689 -46.939,-25.984 v2(-47.041,-25.883)
  Bottom Layer w0.254: TFT_CON1.25@-75.819,-11.622 -71.004,-11.622 -63.881,-18.745 -57.709,-18.745 -50.945,-25.509 -47.487,-25.509 ; -47.479,-25.502 -47.193,-25.502 -47.041,-25.654
TFT_P_DB9_FSMC_D9: TFT_CON1.26 U6.43 | length 45.9
  Top Layer w0.254: U6.43@-49.11,-33.418 -47.754,-33.418 -45.72,-31.384 -45.72,-27.381 -46.482,-26.619 v2(-46.482,-25.552)
  Bottom Layer w0.254: TFT_CON1.26@-75.819,-11.122 -70.844,-11.122 -63.729,-18.237 -57.506,-18.237 -50.851,-24.892 -46.711,-24.892 -46.482,-25.121 v2(-46.482,-25.552)
TFT_P_DB10_FSMC_D10: TFT_CON1.27 U6.44 | length 47.4
  Top Layer w0.254: U6.44@-49.11,-33.918 -47.715,-33.918 -45.339,-31.542 -45.339,-27.115 -45.812,-26.642 -45.812,-26.492 -45.974,-26.33 v2(-45.974,-26.289)
  Bottom Layer w0.254: TFT_CON1.27@-75.819,-10.622 -70.683,-10.622 -63.551,-17.755 -57.302,-17.755 -50.779,-24.278 -46.588,-24.278 -45.974,-24.892 v2(-45.974,-26.289)
TFT_P_DB11_FSMC_D11: TFT_CON1.28 U6.45 | length 48.8
  Top Layer w0.254: U6.45@-49.11,-34.418 -47.676,-34.418 -44.933,-31.674 -44.933,-26.983 -45.208,-26.708 -45.208,-26.42 v2(-45.237,-26.391)
  Bottom Layer w0.254: TFT_CON1.28@-75.819,-10.122 -70.574,-10.122 -63.424,-17.272 -57.099,-17.272 -50.474,-23.897 -46.43,-23.897 -45.593,-24.734 -45.593,-25.462 -45.248,-25.807 -45.248,-26.381 v2(-45.237,-26.391)
TFT_P_DB12_FSMC_D12: TFT_CON1.29 U6.46 | length 50.3
  Top Layer w0.254: U6.46@-49.11,-34.918 -47.637,-34.918 -44.501,-31.781 -44.501,-26.949 -44.425,-26.873 -44.425,-26.441 v2(-44.577,-26.289)
  Bottom Layer w0.254: TFT_CON1.29@-75.819,-9.622 -70.439,-9.622 -63.297,-16.764 -56.921,-16.764 -50.169,-23.516 -46.272,-23.516 -45.212,-24.576 -45.212,-25.304 -44.606,-25.91 -44.606,-26.26 v2(-44.577,-26.289)
TFT_P_DB13_FSMC_D13: TFT_CON1.30 U6.55 | length 53.2
  Top Layer w0.254: U6.55@-45.56,-38.468 -45.56,-34.576 -43.202,-32.218 -43.202,-28.068 -43.002,-27.869 v2(-43.002,-27.254)
  Bottom Layer w0.254: TFT_CON1.30@-75.819,-9.122 -70.278,-9.122 -63.144,-16.256 -56.794,-16.256 ; -56.769,-16.256 -49.89,-23.135 ; -49.915,-23.135 -49.89,-23.135 ; v2(-43.002,-27.254) -43.993,-26.264 -43.993,-25.984 -44.831,-25.146 -44.831,-24.419 -46.114,-23.135 -49.89,-23.135
TFT_P_DB14_FSMC_D14: TFT_CON1.31 U6.56 | length 53.9
  Top Layer w0.254: U6.56@-45.06,-38.468 -45.06,-34.722 -42.748,-32.41 -42.748,-28.296 -42.507,-28.054 -42.507,-26.835 v2(-42.977,-26.365)
  Bottom Layer w0.254: TFT_CON1.31@-75.819,-8.622 -70.169,-8.622 -63.043,-15.748 -56.617,-15.748 -49.61,-22.754 -45.953,-22.754 -44.02,-24.687 -44.02,-25.271 -43.467,-25.824 -43.467,-25.9 -43.002,-26.365 v2(-42.977,-26.365)
TFT_P_DB15_FSMC_D15: TFT_CON1.32 U6.57 | length 54.8
  Top Layer w0.254: U6.57@-44.56,-38.468 -44.56,-34.832 -42.291,-32.563 -42.291,-28.575 -41.884,-28.168 v2(-41.884,-27.432)
  Bottom Layer w0.254: TFT_CON1.32@-75.819,-8.122 -70.059,-8.122 -62.916,-15.265 -56.439,-15.265 -49.428,-22.276 -45.822,-22.276 -41.884,-26.213 v2(-41.884,-27.432)
TFT_P_RD_FSMC_NOE: TFT_CON1.12 U6.85 | length 48
  Top Layer w0.254: v2(-36.576,-32.385) -36.552,-32.409 -34.019,-32.409 U6.85@-34.01,-32.418
  Bottom Layer w0.254: TFT_CON1.12@-75.819,-18.122 -73.215,-18.122 -67.715,-23.622 -62.061,-23.622 -55.943,-29.739 -54.208,-29.739 -51.224,-32.723 -36.914,-32.723 v2(-36.576,-32.385)
TFT_P_RS_FSMC_A23: TFT_CON1.10 U6.1 | length 56.1
  Top Layer w0.254: v2(-35.814,-25.654) -35.814,-25.613 -35.56,-25.359 U6.1@-35.56,-23.368
  Bottom Layer w0.254: TFT_CON1.10@-75.819,-19.122 -73.461,-19.122 -68.199,-24.384 -62.388,-24.384 -56.107,-30.664 -56.096,-30.664 -55.823,-30.937 -54.534,-30.937 -51.943,-33.528 -36.322,-33.528 -35.611,-32.817 -35.611,-31.363 -35.814,-31.16 v2(-35.814,-25.654)
TFT_P_WR_FSMC_NWE_CLK: R39.1 TFT_CON1.11 U6.86 | length 50.6
  Top Layer w0.254: v2(-54.889,-30.353) R39.1@-54.102,-30.353 ; v2(-36.449,-31.623) -36.408,-31.623 -36.113,-31.918 U6.86@-34.01,-31.918
  Bottom Layer w0.254: TFT_CON1.11@-75.819,-18.622 -73.254,-18.622 -67.873,-24.003 -62.218,-24.003 -55.868,-30.353 v2(-54.889,-30.353) ; v2@-54.889,-30.378 -54.331,-30.378 -51.562,-33.147 -36.48,-33.147 -36.083,-32.751 -36.083,-32.719 -35.992,-32.627 -35.992,-32.08 v2(-36.449,-31.623)
TFT_SDI_MOSI: R41.1 TFT_CON1.13 | length 30.9
  Top Layer w0.254: v2(-55.701,-29.155) -55.701,-29.901 -55.753,-29.953 -55.753,-33.147 -55.245,-33.655 R41.1@-54.102,-33.655
  Bottom Layer w0.254: TFT_CON1.13@-75.819,-17.622 -73.176,-17.622 -67.557,-23.241 -61.415,-23.241 -58.776,-25.88 -58.776,-26.081 v2(-55.701,-29.155)
TFT_SDO_MISO: R40.1 TFT_CON1.14 | length 30
  Top Layer w0.254: v2(-55.042,-29.083) -55.042,-29.781 -55.372,-30.111 -55.372,-31.855 -55.223,-32.004 R40.1@-54.127,-32.004
  Bottom Layer w0.254: TFT_CON1.14@-75.819,-17.122 -73.138,-17.122 -67.4,-22.86 -61.17,-22.86 -55.117,-28.913 -55.117,-28.967 -55.042,-29.042 v2(-55.042,-29.083)
TFT_SPI_CS_FSMC_NE1: TFT_CON1.9 U6.88 | length 50.2
  Top Layer w0.254: v2(-35.23,-30.918) U6.88@-34.01,-30.918
  Bottom Layer w0.254: TFT_CON1.9@-75.819,-19.622 -73.672,-19.622 -68.478,-24.816 -62.495,-24.816 -55.935,-31.375 -54.634,-31.375 -52.101,-33.909 -36.068,-33.909 -35.23,-33.071 v2(-35.23,-30.918)
TFT_TO_MCU_FMARK_PB12: TFT_CON1.8 U6.51 | length 37.4
  Top Layer w0.254: v2(-48.565,-38.703) -47.951,-38.703 -47.716,-38.468
  Bottom Layer w0.254: TFT_CON1.8@-75.819,-20.122 -73.858,-20.122 -68.783,-25.197 -62.738,-25.197 -56.178,-31.756 -54.792,-31.756 -52.259,-34.29 -50.454,-34.29 -48.565,-36.179 v2(-48.565,-38.703)
USB_VBUS: D1.1 D2.1 D3.2 TEST2.1 TYPE_C_1.2 TYPE_C_1.5 | length 26.2
  Top Layer w0.254: TEST2.1@-15.748,-49.911 -15.621,-49.784 -15.367,-49.784 -14.605,-49.022 -12.065,-49.022 -11.852,-49.235 D3.2@-11.852,-50.317 ; D1.1@-10.668,-53.848 D1.1@-10.462,-53.642
  Top Layer w0.635: D3.2@-11.852,-50.317 -11.852,-52.664 D1.1@-10.668,-53.848 D2.1@-10.668,-58.42 ; D1.1@-10.462,-53.642 TYPE_C_1.5@-6.604,-53.642 -4.27,-53.642 -3.81,-54.102 -3.81,-56.134 -4.358,-56.682 TYPE_C_1.2@-6.604,-56.682
VBUS_T: C5.2 C7.1 D2.2 R17.2 R19.2 TEST4.1 U4.4 | length 52.4
  Top Layer w0.203: R19.2@-37.541,-43.967 R19.2@-37.541,-43.866
  Top Layer w0.254: R19.2@-37.821,-43.866 -37.821,-44.425 -37.567,-44.679 -36.449,-44.679 -34.163,-46.965 -32.309,-46.965 -30.226,-49.047 -30.226,-49.911 -29.083,-51.054 -25.527,-51.054 -25.019,-51.562 U4.4@-25.019,-52.451 ; TEST4.1@-21.971,-51.816 -20.803,-52.984 C5.2@-19.812,-52.984
  Top Layer w0.635: U4.4@-25.019,-52.451 -23.495,-52.451 -21.971,-53.975 -19.812,-53.975 ; C5.2@-19.812,-52.984 -19.812,-53.975 ; v1(-13.691,-49.987) v1(-13.691,-51.13) -13.691,-51.587 -13.208,-52.07 -13.208,-57.912 -13.716,-58.42 D2.2@-15.668,-58.42 -16.811,-57.277 -19.304,-57.277 -19.812,-56.769 C7.1@-19.812,-55.448 -19.812,-53.975 ; v1(-12.954,-46.101) -12.954,-47.142 R17.2@-12.725,-47.371
  Bottom Layer w0.635: v1@-13.716,-49.987 -13.716,-49.276 -12.954,-48.514 v1(-12.954,-46.101) ; v1(-13.691,-51.13) v1(-13.691,-49.987)
VCC_1.8V: C45.1 R59.2 R62.2 R65.2 TFT_CON1.6 U7.2 U7.4 | length 90.8
  Top Layer w0.254: -77.47,-20.066 -76.835,-19.431 -76.835,-17.856 -75.032,-16.053 -75.032,-5.182 -74.472,-4.622 -71.043,-4.622 -70.485,-4.064 v1(-70.485,-3.556)
  Top Layer w0.381: v4(-78.74,-20.066) v4(-77.851,-20.066) -77.47,-20.066
  Bottom Layer w0.381: -77.851,-20.447 -77.176,-21.122 TFT_CON1.6@-75.819,-21.122 -74.255,-21.122 -73.66,-21.717 -73.66,-35.052
  Bottom Layer w0.508: -77.851,-20.447 v4(-77.851,-20.066)
  Bottom Layer w0.635: C45.1@-78.232,-35.052 -73.66,-35.052 -68.453,-35.052 -67.408,-36.097 U7.4@-67.408,-42.432 U7.2@-61.468,-42.432 ; R65.2@-71.603,-3.556 v1(-70.485,-3.556) v1(-69.469,-3.556) -69.215,-3.556 -69.215,-0.762 -63.5,-0.762 ; R62.2@-66.523,-3.556 -63.5,-3.556 -63.5,-0.762 ; R59.2@-60.427,-3.556 v1(-59.182,-3.556) -58.928,-3.556 -58.547,-3.175 -58.547,-0.762 -63.5,-0.762
VCC_3.3V: C11.1 C12.1 C15.1 C39.1 C41.2 C42.2 C46.2 D6.1 L1.2 M2.1 M4.5 M4.6 Q8.2 R13.1 R50.1 R51.1 R52.1 R53.1 R54.1 R58.2 R68.2 R74.2 R79.1 R80.2 R82.2 R107.2 TEST11.1 TFT_CON1.7 TOUCH_CON1.3 | length 231.4
  Top Layer w0.254: R13.1@-78.994,-49.78 R13.1@-78.99,-49.784 ; v5@-72.295,-30.004 v5(-72.263,-29.972) ; M4.5@-19.877,-16.74 M4.6@-19.877,-16.24 ; Q8.2@-19.812,-23.419 Q8.2@-19.787,-23.393 ; C46.2@-18.329,-16.24 C46.2@-18.288,-16.281 ; C39.1@-15.773,-16.281 C39.1@-15.748,-16.256
  Top Layer w0.381: R68.2@-68.047,-24.892 -66.675,-24.892 -65.913,-25.654 -65.913,-25.781 v3(-65.862,-25.781) v3(-65.151,-25.781) -64.389,-25.019 -64.389,-22.86 -63.373,-21.844 -63.373,-13.081 -63.627,-12.827 v1(-63.627,-12.446) v1(-63.627,-11.43) ; M4.6@-19.877,-16.24 C46.2@-18.329,-16.24
  Top Layer w0.635: R13.1@-78.994,-49.78 v1(-78.994,-46.507) -78.994,-45.466 -80.899,-43.561 -80.899,-31.979 -78.924,-30.004 TOUCH_CON1.3@-75.184,-30.004 v5@-72.295,-30.004 ; C12.1@-72.136,-49.784 -70.739,-49.784 ; v1(-70.739,-48.768) -70.739,-49.784 ; C41.2@-69.621,-27.432 C42.2@-69.621,-28.956 -69.621,-29.693 v4(-69.024,-30.29) v4(-68.072,-30.29) R79.1@-68.072,-31.75 R79.1@-68.072,-32.004 ; TEST11.1@-67.056,-48.768 -68.072,-49.784 C11.1@-69.596,-49.784 -70.739,-49.784 ; R82.2@-27.051,-15.621 R74.2@-25.146,-15.621 v1(-23.622,-15.621) ; M2.1@-24.384,-6.604 -24.384,-9.144 v1(-23.622,-9.144) v1(-22.606,-9.144) D6.1@-19.304,-9.144 ; Q8.2@-19.787,-23.393 R80.2@-19.787,-21.844 v1(-17.145,-21.844) v1(-15.748,-21.844) ; C46.2@-18.288,-16.281 C39.1@-15.773,-16.281 ; C39.1@-15.748,-16.256 v1(-15.748,-14.605) ; v1(-5.207,-21.514) R50.1@-5.207,-18.923 R51.1@-5.207,-16.51 R52.1@-5.207,-14.097 R53.1@-5.207,-11.684 R54.1@-5.207,-9.271
  Bottom Layer w0.254: TFT_CON1.7@-75.819,-20.622 -73.993,-20.622 -72.974,-21.641 -72.974,-25.781 ; v5(-72.263,-29.972) -72.263,-29.058 -72.974,-28.346 -72.974,-25.781 ; v3(-65.151,-25.781) v3(-65.862,-25.781) -72.974,-25.781
  Bottom Layer w0.381: v1(-63.627,-11.43) v1(-63.627,-12.446) -63.627,-13.716 -62.611,-14.732 -60.427,-14.732 ; R107.2@-60.427,-13.716 -60.427,-14.732 ; v1(-23.622,-15.621) -23.622,-17.526 -24.181,-18.085 -52.857,-18.085 -56.21,-14.732 -60.427,-14.732
  Bottom Layer w0.635: v1(-78.994,-46.507) -79.045,-46.507 -79.045,-46.939 -78.994,-46.99 -76.708,-46.99 -76.454,-47.244 L1.2@-76.454,-49.298 -75.924,-48.768 v1(-70.739,-48.768) C15.1@-65.532,-48.768 -57.912,-48.768 -56.871,-47.727 R58.2@-56.871,-44.704 ; v5(-72.263,-29.972) -69.342,-29.972 v4(-69.024,-30.29) ; v1(-23.622,-15.621) v1(-23.622,-14.605) ; v1(-23.622,-9.144) v1(-23.622,-14.605) ; v1(-15.748,-21.844) v1(-15.748,-14.605) ; v1(-5.207,-21.514) -5.207,-15.646 -6.248,-14.605 v1(-14.605,-14.605) v1(-15.748,-14.605) ; v1(-23.622,-14.605) v1(-15.748,-14.605)
  other v1: -5.232,-20.447
VCC_3.3V_MCU: C8.2 C9.1 C22.1 C23.1 C24.1 C25.1 C26.1 C27.2 C29.2 C32.1 CON6.4 R33.1 R44.1 R46.1 R56.1 TEST12.1 U1.2 U6.6 U6.11 U6.19 U6.21 U6.22 U6.28 U6.50 U6.75 U6.100 | length 186.5
  Top Layer w0.203: C8.2@-40.107,-47.65 -39.548,-48.209 -38.329,-48.209 -38.1,-48.438 U1.2@-38.1,-49.225 ; TEST12.1@-33.045,-45.822 -32.156,-45.822 v4(-31.369,-46.609)
  Top Layer w0.254: C27.2@-52.553,-24.359 -52.172,-24.359 -50.612,-25.918 U6.28@-49.11,-25.918 -47.94,-25.918 -46.711,-24.689 -45.56,-24.689 ; C24.1@-50.648,-19.939 -49.606,-19.939 v3(-49.174,-20.371) ; U6.50@-49.11,-36.918 -48.348,-36.918 -47.447,-36.017 v2(-47.447,-35.509) ; U6.22@-46.06,-23.368 -46.06,-21.819 -45.56,-21.819 U6.21@-45.56,-23.368 -45.56,-24.689 ; v3(-44.501,-21.996) -44.56,-22.056 U6.19@-44.56,-23.368 -44.56,-24.528 -44.721,-24.689 -45.56,-24.689 ; C25.1@-43.205,-19.939 -43.205,-20.93 -42.951,-21.184 v3(-42.596,-21.184) v3(-41.783,-21.184) -41.046,-21.184 -40.56,-21.67 U6.11@-40.56,-23.368 -40.56,-24.235 -40.259,-24.536 -38.049,-24.536 ; v3@-36.678,-24.79 v3(-36.754,-24.79) -37.008,-24.536 -38.049,-24.536 ; U6.75@-35.56,-38.468 -34.938,-38.468 v3(-32.918,-40.488) ; U6.100@-34.01,-24.918 v3(-34.01,-24.282) v3(-34.01,-22.683) ; C22.1@-33.68,-19.812 v3(-33.68,-20.828) -36.576,-20.828 -36.83,-20.574 C23.1@-36.83,-19.812 -37.668,-19.812 -38.06,-20.204 U6.6@-38.06,-23.368 -38.06,-24.526 -38.049,-24.536 ; C32.1@-31.979,-42.291 -31.267,-42.291 -31.064,-42.494 -31.064,-46.304 v4(-31.369,-46.609) ; v3(-31.242,-32.258) -29.718,-32.258 -28.88,-33.096 -26.619,-33.096 -26.416,-32.893 R46.1@-26.416,-32.258 -25.527,-32.258 -25.146,-31.877 -25.146,-28.956 ; C26.1@-26.416,-28.956 -25.146,-28.956 ; v3(-26.416,-24.435) R56.1@-26.416,-25.451 -24.384,-25.451 -24.384,-28.194 -25.146,-28.956
  Top Layer w0.635: R44.1@-54.864,-43.688 -55.042,-43.866 -55.042,-44.831 -45.695,-44.831 -45.695,-42.139 ; C29.2@-47.701,-42.139 -45.695,-42.139 ; v1(-43.434,-42.139) v1(-44.577,-42.139) -45.695,-42.139 ; v1(-38.1,-50.419) U1.2@-38.1,-49.225 ; v2(-20.32,-45.212) R33.1@-20.32,-44.196
  Bottom Layer w0.203: -27.686,-40.488 -27.559,-40.615
  Bottom Layer w0.254: v3(-49.174,-20.371) -48.362,-21.184 -44.501,-21.184 ; v2(-47.447,-35.509) -45.187,-35.509 -44.577,-36.119 v1(-44.577,-42.139) ; v3(-44.501,-21.996) -44.501,-21.184 ; v3(-42.596,-21.184) -44.501,-21.184 ; v3(-36.754,-24.79) -36.246,-24.282 v3(-34.01,-24.282) -29.007,-24.282 -27.559,-22.835 -26.264,-22.835 -26.01,-23.089 -26.01,-24.028 v3(-26.416,-24.435) ; v3(-34.01,-22.683) -33.68,-22.353 v3(-33.68,-20.828) v3@-33.68,-20.777 ; -32.918,-46.66 -32.868,-46.609 v4(-31.369,-46.609)
  Bottom Layer w0.635: v1(-44.577,-42.139) v1(-43.434,-42.139) -32.918,-42.139 ; v1(-38.1,-50.419) -33.503,-50.419 -32.918,-49.835 -32.918,-46.66 C9.1@-32.918,-43.815 ; v3(-31.242,-32.258) -30.201,-32.258 -27.508,-34.95 -27.508,-40.564 -27.559,-40.615 -27.559,-41.656 ; C9.1@-31.115,-43.815 C9.1@-32.918,-43.815 ; CON6.4@-28.956,-41.656 -27.559,-41.656 ; -27.686,-40.488 v3(-32.918,-40.488) -32.918,-42.139 ; v2(-20.32,-45.212) -22.606,-45.212 -24.892,-42.926 -27.559,-42.926 -27.559,-41.656 ; C9.1@-32.918,-43.815 C9.1@-33.037,-43.815 C9.1@-32.918,-43.696 ; C9.1@-32.918,-43.815 C9.1@-32.918,-43.696 ; C9.1@-32.918,-43.696 -32.918,-42.139
VCC_3.3V_SD: C43.2 Q8.3 R72.2 R78.2 R80.1 R84.2 R108.2 R111.2 SD1.4 | length 40.9
  Top Layer w0.254: -22.365,-21.857 -22.352,-21.844
  Top Layer w0.635: v1(-23.114,-39.751) -22.86,-39.497 R72.2@-21.361,-39.497 ; v1(-23.114,-37.592) -22.987,-37.465 R78.2@-21.361,-37.465 ; v1(-23.114,-35.687) -22.987,-35.56 C43.2@-21.361,-35.56 ; v1(-23.114,-33.147) -22.987,-33.02 R84.2@-21.361,-33.02 ; v1(-23.114,-31.115) -22.987,-30.988 R108.2@-21.361,-30.988 ; v1(-23.114,-29.083) -22.987,-28.956 R111.2@-21.361,-28.956 ; v1(-23.114,-25.654) -23.114,-25.082 Q8.3@-22.365,-24.333 -22.365,-21.857 ; -22.352,-21.844 R80.1@-21.336,-21.844 ; SD1.4@-17.272,-32.764 v1(-14.861,-32.764)
  Bottom Layer w0.635: v1(-23.114,-39.751) v1(-23.114,-37.592) v1(-23.114,-35.687) v1(-23.114,-33.147) ; v1(-23.114,-25.654) v1(-23.114,-29.083) v1(-23.114,-31.115) v1(-23.114,-33.147) ; v1(-14.861,-32.764) -15.244,-33.147 v1(-23.114,-33.147)
VCC_3.3V_WIFI: C19.1 C20.2 CON5.4 M1.2 R21.2 R25.2 R36.1 TEST18.1 U5.2 U5.4 | length 113.9
  Top Layer w0.254: TEST18.1@-57.277,-49.53 -55.753,-48.006 ; -55.118,-48.895 -54.991,-48.768
  Top Layer w0.635: M1.2@-79.248,-3.302 -74.295,-3.302 -74.295,-0.762 -57.404,-0.762 CON5.4@-57.404,-2.032 ; v4(-60.37,-28.485) -60.227,-28.485 -60.01,-28.702 R21.2@-57.912,-28.702 -57.912,-16.637 -55.88,-14.605 v4(-55.88,-13.843) v4(-56.642,-13.843) ; v2(-59.055,-13.462) v2(-59.055,-12.573) v2(-59.055,-8.89) v2(-59.055,-8.001) ; v4(-58.42,-34.798) -58.42,-41.119 -58.128,-41.411 -58.128,-41.491 -57.988,-41.631 R25.2@-57.912,-41.631 -56.921,-41.631 -56.261,-42.291 -56.261,-47.498 -55.753,-48.006 -54.991,-48.768 v1(-51.181,-48.768) ; R36.1@-58.293,-4.572 -58.293,-5.779 v1(-58.102,-5.969) v1(-57.023,-5.969)
  Bottom Layer w0.254: v2@-59.055,-13.589 v2(-59.055,-13.462)
  Bottom Layer w0.635: v4(-60.37,-28.485) -60.452,-28.566 -60.452,-30.607 -59.182,-31.877 -59.182,-32.305 -59.195,-32.318 -59.195,-32.96 -58.293,-33.862 -58.293,-34.671 v4(-58.42,-34.798) ; v2@-59.055,-13.589 -58.801,-13.843 v4(-56.642,-13.843) ; v2(-59.055,-13.462) v2(-59.055,-12.573) ; v2(-59.055,-8.001) -59.055,-7.493 -58.102,-6.54 v1(-58.102,-5.969) -58.102,-4.508 -57.404,-3.81 CON5.4@-57.404,-2.032 ; C19.1@-54.356,-48.768 v1(-51.181,-48.768) v1(-50.038,-48.768) -48.082,-48.768 -46.654,-47.34 U5.4@-46.654,-42.404 U5.2@-52.324,-42.404
  Bottom Layer w0.762: C20.2@-54.864,-42.647 -54.621,-42.404 U5.2@-52.324,-42.404
VCC_5V_CO2: C44.1 L3.2 M3.9 R30.1 | length 73.3
  Top Layer w0.635: R30.1@-38.1,-4.572 -36.703,-4.572
  Bottom Layer w0.635: v5(-36.195,-5.08) -35.458,-4.343 -30.582,-4.343 -29.845,-5.08 ; -29.646,-5.08 -5.766,-5.08 -3.937,-6.909 -3.937,-30.988 ; C44.1@-10.16,-30.988 -3.937,-30.988 ; -3.917,-16.276 M3.9@-1.796,-16.276 ; L3.2@-2.794,-35.819 -2.794,-30.963 -2.819,-30.988 -3.912,-30.988 ; -3.937,-30.988 -3.937,-31.013 -3.912,-30.988 ; -3.937,-30.988 -3.912,-30.988
VCC_ALL_CTR: Q1.3 Q3.2 R1.1 TEST8.1 U1.3 | length 35.6
  Top Layer w0.203: -42.85,-45.822 -42.85,-45.796
  Top Layer w0.254: -37.592,-57.023 TEST8.1@-37.592,-55.372
  Top Layer w0.508: R1.1@-44.196,-59.536 -43.688,-59.028 Q1.3@-43.688,-56.854 -43.688,-55.499 ; -43.688,-46.66 -43.688,-55.499 ; -42.85,-45.796 -37.109,-45.796 -35.179,-47.727 U1.3@-35.179,-48.285 ; Q3.2@-34.036,-56.314 -34.745,-57.023 -37.592,-57.023 -38.1,-57.023 -39.624,-55.499 -43.688,-55.499
  Top Layer w0.635: -43.688,-46.66 -42.85,-45.822
pads on no net: M1.4 M1.5 M1.6 M1.7 M1.8 M1.9 M1.10 M1.11 M1.12 M1.13 M1.14 M1.16 M1.17 M1.18 M1.19 M1.20 M1.21 M1.22 M1.23 M1.24 M1.26 M1.29 M1.30 M1.31 M1.32 M1.33 M1.36 M1.37 M1.39 M3.1 M3.4 M3.5 M3.6 M3.7 M4.3 SD1.9 TFT_CON1.1 TFT_CON1.2 TFT_CON1.3 TFT_CON1.4 TFT_CON1.41 TFT_CON1.42 TOUCH_CON1.7 TOUCH_CON1.8 TYPE_C_1.0 TYPE_C_1.3 TYPE_C_1.4 U3.7 U4.1 U6.7 U6.15 U6.16 U6.17 U6.24 U6.33 U6.36 U6.67 U6.70 U6.71 U6.77 U6.97 U6.98

## Polygon pours and split planes (outlines as drawn)
GND on Top Layer "Top Layer-No Net 1" (solid, remove dead copper, pour order 2): -82.321,0.406 -82.347,0.381 -82.347,-61.849 0.356,-61.849 0.356,0.406 -82.347,0.406
GND on Bottom Layer "Top Layer-No Net 1" (solid, remove dead copper, pour order 4): -82.347,0.381 -82.347,-61.849 0.356,-61.849 0.33,-61.824 0.33,0.406 -82.321,0.406

## Keep-outs
Keep-Out Layer:
  lines w0.254: -82.347,-0.127 -82.347,0.381 -82.321,0.406 0.356,0.406 0.356,-61.874 -82.347,-61.874 -82.347,0

## Other copper
Top Layer:
  pour cut-out: -47.447,-0.787 -47.447,-3.302 -37.287,-3.302 -37.287,-0.889 -37.389,-0.787
  pour cut-out: -29.159,-10.77 -29.159,-13.589 -29.134,-13.614 -23.47,-13.614 -23.47,-10.795 -23.495,-10.77
  pour cut-out: -29.185,-5.207 -29.185,-8.026 -23.393,-8.026 -23.393,-5.207
  pour cut-out: -58.674,-7.366 -58.674,-9.906 -48.514,-9.906 -48.514,-7.366
  pour cut-out: -58.674,-0.762 -58.674,-3.277 -48.514,-3.277 -48.514,-0.762 -48.539,-0.737 -48.565,-0.762
  pour cut-out: -27.686,-51.562 -27.686,-55.728 -27.661,-55.753 -24.384,-55.753 -24.384,-51.562
  pour cut-out: -4.445,-41.173 -7.01,-41.173 -6.985,-41.199 -6.985,-48.717 -4.47,-48.717 -4.42,-48.666 -4.445,-48.641 -4.445,-47.854
  pour cut-out: -7.874,-51.689 -7.874,-58.674 -5.232,-58.674 -5.232,-51.689
  pour cut-out: -60.808,-51.46 -60.808,-56.515 -59.055,-56.515 -59.055,-51.46 -59.08,-51.435 -59.106,-51.46
  pour cut-out: -66.573,-51.562 -66.573,-56.49 -66.548,-56.464 -64.922,-56.464 -64.922,-51.511 -64.973,-51.562
  pour cut-out: -78.435,-55.702 -78.435,-56.972 -78.384,-57.023 -75.286,-57.023 -75.286,-55.728 -75.336,-55.677 -75.362,-55.702
  pour cut-out: -78.613,-52.578 -78.613,-54.28 -78.588,-54.254 -75.311,-54.254 -75.311,-52.578
  pour cut-out: -82,-44.924 -81.966,-44.958 -81.94,-44.933 -69.748,-44.933 -69.748,-39.929 -69.875,-39.802 -82,-39.802
  pour cut-out: -38.913,-51.003 -33.807,-51.003 -33.782,-51.029 -33.782,-53.315 -38.862,-53.315 -38.913,-53.264
  pour cut-out: -30.226,-40.335 -30.251,-40.361 -30.251,-50.546 -24.587,-50.546 -24.638,-50.495 -24.638,-40.361 -30.201,-40.361
  pour cut-out: -3.658,-6.985 -3.632,-7.01 -3.632,-17.932 -0.152,-17.932 -0.152,-6.985
  pour cut-out: -33.147,-4.42 -33.147,-17.958 -29.642,-17.958 -29.642,-4.42
  pour cut-out: -24.765,0 -24.765,-4.826 -13.335,-4.826 -13.335,0
  region net GND: -17.653,-4.191 -13.97,-4.191 -13.97,-1.016 -17.653,-1.016
  region net GND: -37.338,-6.223 -37.338,-9.017 -34.417,-8.992 -34.417,-6.223
  pour cut-out: -37.821,-5.639 -37.821,-16.84 -33.782,-16.84 -33.782,-5.715 -33.858,-5.639
  pour cut-out: -53.492,-11.963 -53.492,-20.803 -53.416,-20.879 -38.583,-20.879 -38.583,-11.938 -38.608,-11.963
  pour cut-out: -73.025,0.381 -73.025,-36.957 -82.347,-36.957 -82.347,0.406
  pour cut-out: -81.788,-17.678 -59.309,-17.678 -59.182,-17.805 -59.182,-22.098 -81.788,-22.098
  pour cut-out: -63.068,-0.381 -63.068,-22.098 -59.182,-22.098 -59.131,-22.047 -59.131,-0.381
  pour cut-out: -50.165,-24.511 -50.165,-37.465 -48.006,-37.465 -48.006,-24.511
  pour cut-out: -48.006,-24.155 -35.179,-24.282 -35.179,-23.089 -35.154,-22.225 -48.006,-22.327
  pour cut-out: -35.052,-24.511 -35.052,-37.338 -32.893,-37.338 -32.918,-37.313 -32.918,-24.511
  pour cut-out: -47.879,-39.421 -35.179,-39.421 -35.179,-37.465 -47.879,-37.465
  pour cut-out: -18.669,-28.829 -18.669,-40.513 -18.644,-40.538 -15.367,-40.538 -15.367,-28.829
  pour cut-out: -7.874,-51.689 -7.874,-58.674 -5.232,-58.674 -5.232,-51.689
Bottom Layer:
  pour cut-out: -47.523,-0.762 -47.523,-3.277 -37.236,-3.277 -37.236,-0.711 -37.262,-0.686 -37.338,-0.762
  pour cut-out: -58.649,-7.341 -58.649,-9.931 -58.623,-9.906 -48.489,-9.906 -48.489,-7.366 -48.514,-7.341
  pour cut-out: -58.649,-0.762 -58.649,-3.277 -48.489,-3.277 -48.489,-0.737 -48.514,-0.762
  pour cut-out: -33.147,-4.445 -33.147,-17.907 -33.122,-17.932 -33.096,-17.907 -29.616,-17.907 -29.616,-4.445 -29.642,-4.47 -33.172,-4.47
  pour cut-out: -0.152,-7.01 -3.632,-7.01 -3.683,-7.061 -3.658,-7.087 -3.658,-17.958 -0.178,-17.958 -0.152,-17.932
  pour cut-out: -7.036,-41.148 -7.036,-48.768 -4.14,-48.768 -4.42,-48.489 -4.42,-41.072 -6.96,-41.072
  pour cut-out: -30.226,-40.488 -30.226,-50.521 -24.663,-50.521 -24.638,-50.495 -24.663,-50.47 -24.663,-40.386 -30.251,-40.386 -30.277,-40.411 -30.201,-40.488
  pour cut-out: -38.862,-53.315 -33.757,-53.315 -33.782,-53.289 -33.782,-51.029 -38.862,-51.029
  pour cut-out: -59.055,-51.435 -59.055,-56.515 -60.808,-56.515 -60.808,-51.46 -59.08,-51.46
  pour cut-out: -66.573,-51.46 -66.548,-51.435 -64.872,-51.435 -64.872,-56.439 -64.897,-56.464 -66.548,-56.464 -66.548,-56.312 -66.573,-56.286
  pour cut-out: -75.286,-55.702 -75.286,-57.226 -75.362,-57.302 -78.435,-57.302 -78.435,-55.702
  pour cut-out: -75.311,-52.578 -78.613,-52.578 -78.613,-54.305 -75.311,-54.305
  pour cut-out: -82,-44.933 -81.989,-44.943 -69.708,-44.943 -69.708,-39.994 -69.926,-39.776 -82,-39.776
  pour cut-out: -82.347,0.381 -73.025,0.33 -73.025,-21.971 -72.898,-22.098 -82.321,-22.098

## Silkscreen, mask and mechanical layers (free items; w line width, h text height)
Top Overlay:
  text "SD CARD" at -4.47,-22.911 h1
  text "3.3_MCU" at -30.632,-42.545 h0.8 r90
  text "3.3_MCU" at -23.876,-42.545 h0.8 r90
  text "TXD" at -23.876,-44.831 h0.8 r90
  text "SWCLK" at -30.48,-45.339 h0.8 r90
  text "SA_1800_V1.0.0_2021.11" at -66.98,-46.736 h1.91
  text "RXD" at -23.876,-47.498 h0.8 r90
  text "SWDIO" at -30.48,-47.879 h0.8 r90
  text "GND" at -30.48,-50.038 h0.8 r90
  text "GND" at -23.876,-50.165 h0.8 r90
Top Solder:
  lines w0.254: -17.628,-1.041 -17.628,-4.166 -14.046,-4.166 -13.995,-4.115 -13.995,-1.041 -14.021,-1.016 -17.628,-1.016 ; -17.551,-1.168 -14.046,-1.168 -14.097,-1.219 -14.097,-3.937 -14.148,-3.988 -17.45,-3.988 -17.501,-3.937 -17.501,-1.194 -17.374,-1.321 -17.374,-3.759 -17.323,-3.81 -14.3,-3.81 -14.249,-3.759 -14.249,-1.295 -14.275,-1.321 -17.323,-1.321 -17.221,-1.422 -17.221,-3.658 -17.196,-3.683 -14.402,-3.683 -14.427,-3.658 -14.427,-1.448 -17.374,-1.448 -17.12,-1.448 -17.069,-1.499 -17.069,-3.556 -16.993,-3.48 -14.63,-3.48 -14.58,-3.429 -14.58,-1.626 -14.605,-1.651 -16.942,-1.651 -16.866,-1.727 -16.866,-3.327 -16.84,-3.302 -14.707,-3.302 -14.757,-3.251 -14.757,-1.829 -16.739,-1.829 -16.637,-1.93 -16.637,-3.15 -16.612,-3.175 -14.884,-3.175 -14.961,-3.099 -14.961,-1.93 -15.011,-1.981 -16.586,-1.981 -16.408,-2.159 -16.408,-3.073 -15.088,-3.073 -15.189,-2.972 -15.189,-2.134 -15.215,-2.159 -16.281,-2.159 -16.205,-2.235 -16.205,-2.946 -15.392,-2.946 -15.392,-2.235 -15.519,-2.362 -16.129,-2.362 -15.977,-2.515 -15.977,-2.819 -15.596,-2.819 -15.494,-2.718 -15.494,-2.642 -15.545,-2.591 -15.951,-2.591 -15.977,-2.565 ; -16.51,-2.54 -16.307,-2.54 -16.053,-2.286